# Allegro board SATROT-2-3.brd
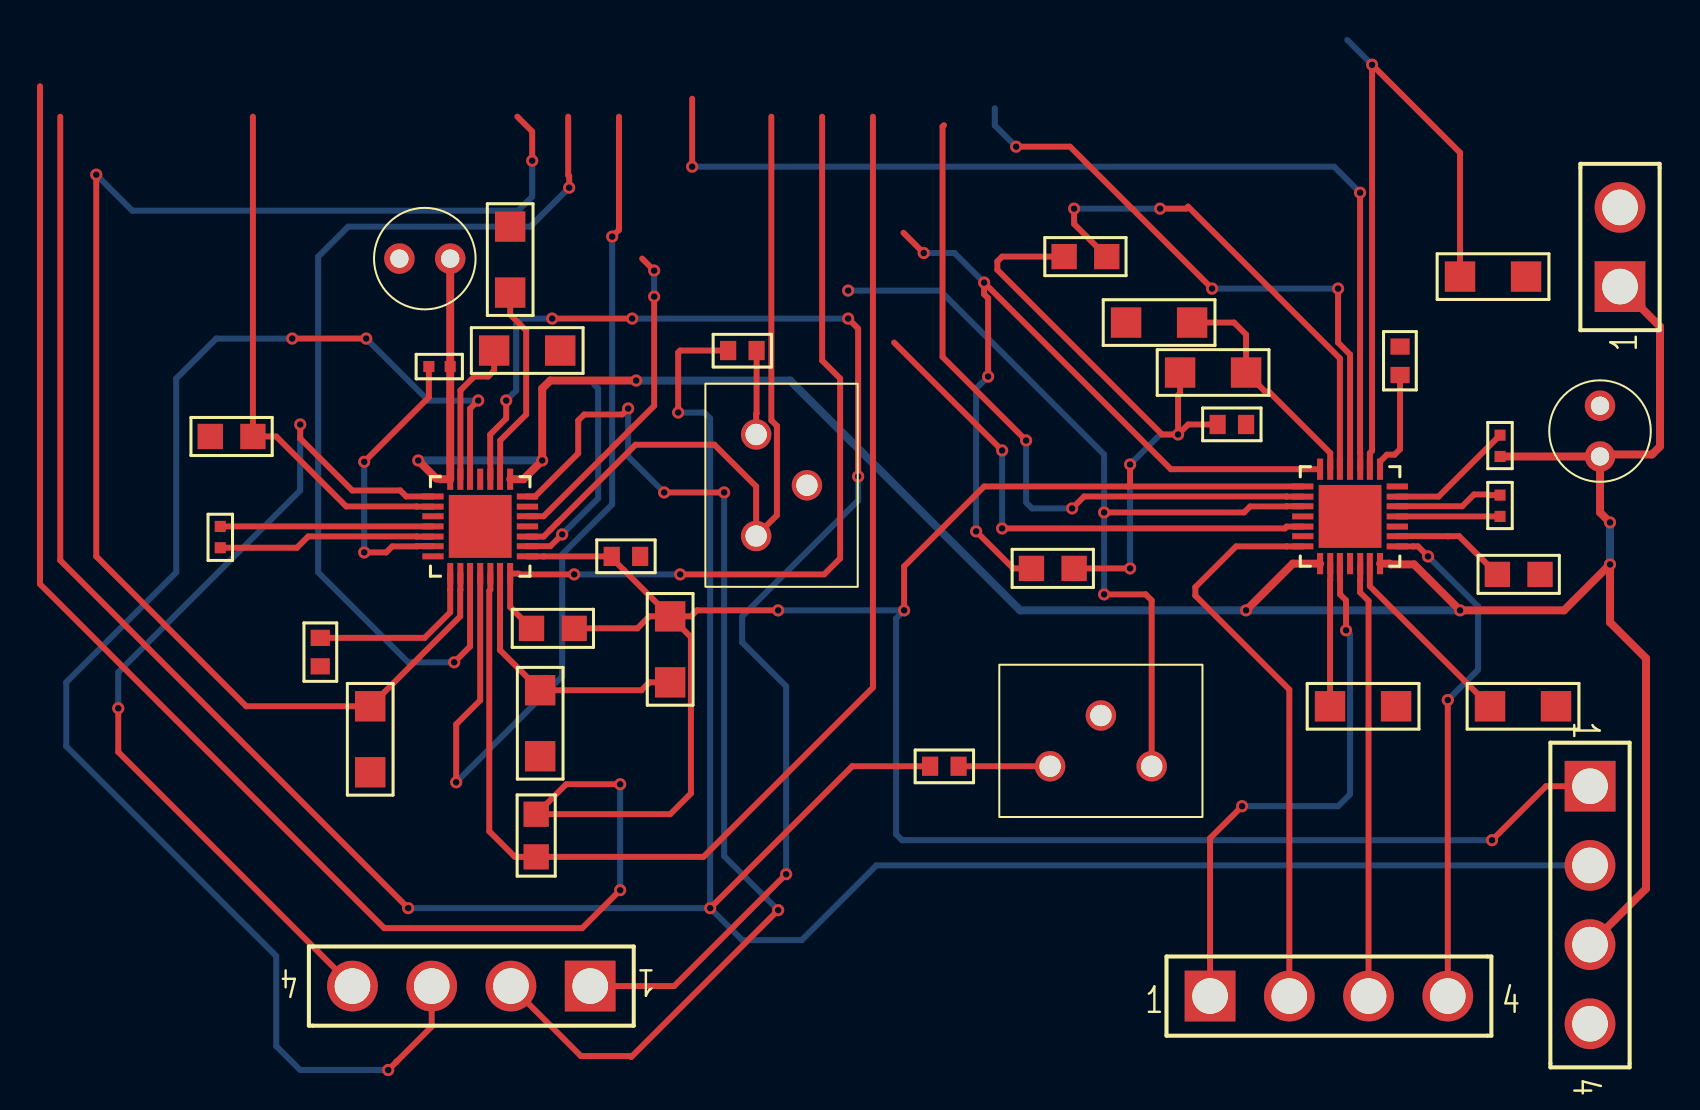
[diagram p0: board, top side]
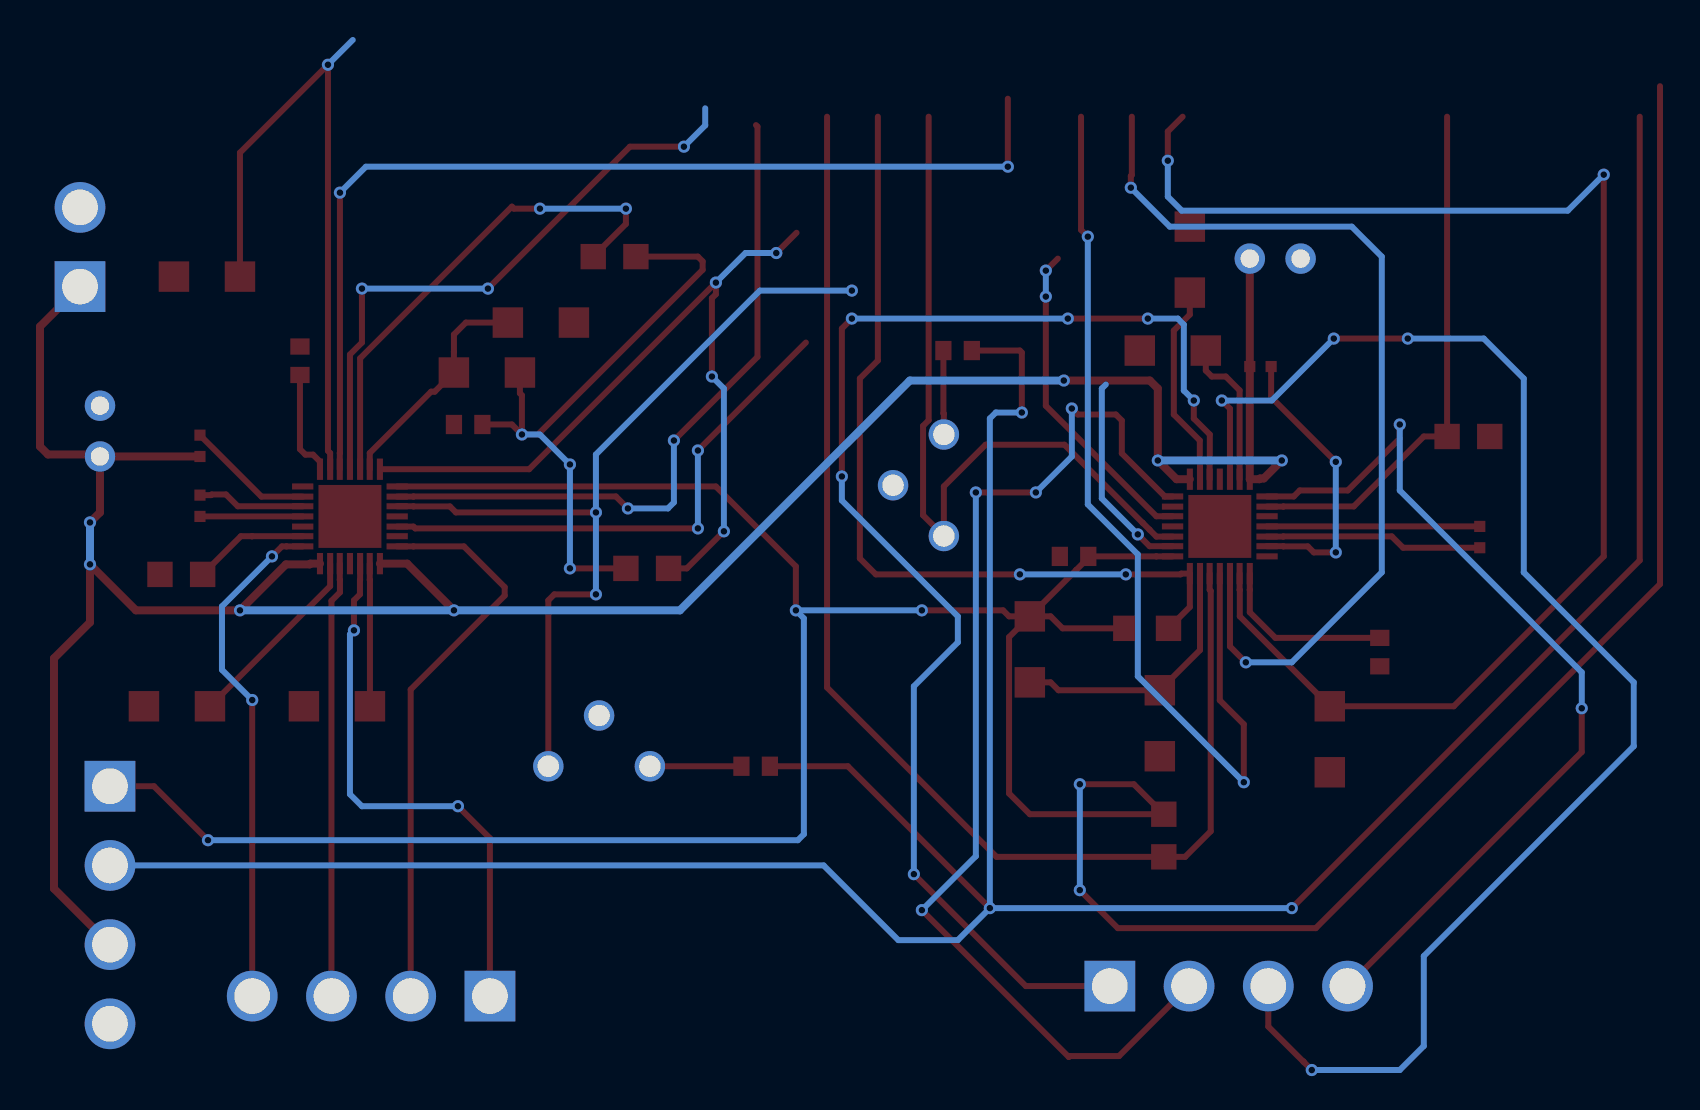
[diagram p1: board, bottom side, seen from below]

No outline. copper layers: TOP, BOTTOM. Coordinates in mm from the lowest, leftmost part position.

## Design rules (mm)
constraint set DEFAULT: min track width 0.3

## Placement (name value [footprint] x y rotation side)
C1  0.1 uF  [SMC0402]  0.5 23.5 270 top
C2  0.22 uF  [SMC0603]  5.5 16.5 90 top
C3  0.1 uF  [SMC0402]  12 31.5 180 top
C4  100 uF  [CAP196]  12 36.9 90 top
C5  0.22 uF  [SMC0603]  21.5 22 180 top
C6  0.1 uF  [SMC0402]  64.5 24 90 top
C7  0.22 uF  [SMC0603]  59.5 32.5 270 top
C8  0.1 uF  [SMC0402]  64.5 27 90 top
C9  100 uF  [CAP196]  69.5 27 0 top
C10  0.22 uF  [SMC0603]  51.8 28.6 180 top
J2  Az Stepper  [BLKCON156VHTM1SQSW1564]  19 0.5 180 top
J3  Motor Power  [BLKCON156VHTM1SQSW1562]  70.5 35.5 90 top
J4  Power Connector  [BLKCON156VHTM1SQSW1564]  69 10.5 270 top
J5  El Stepper  [BLKCON156VHTM1SQSW1564]  50 0 0 top
R1  10K  [SMR1206]  16.5 12 90 top
R2  NP  [SMR1206]  23 19 270 top
R3  100k  [SMR0805]  16.3 9.1 270 top
R4  100k  [SMR0805]  18.2 18.4 180 top
R5  10K POT  [POT]  27.3 28.1 270 top
R6  20K  [SMR0603]  25.9 32.3 0 top
R7  NP  [SMR1206]  8 14.5 270 top
R8  100k  [SMR0805]  0 28 0 top
R9  0.05  [SMR1206]  15 35.2 90 top
R10  0.05  [SMR1206]  14.2 32.3 0 top
R11  10K  [SMR1206]  45.8 33.7 0 top
R12  NP  [SMR1206]  48.5 31.2 0 top
R13  100k  [SMR0805]  42.7 37 0 top
R14  100k  [SMR0805]  43.2 21.4 180 top
R15  10K POT  [POT]  42 11.5 0 top
R16  20K  [SMR0603]  36 11.5 0 top
R17  NP  [SMR1206]  62.5 36 0 top
R18  100k  [SMR0805]  66.5 21.1 180 top
R19  0.05  [SMR1206]  56 14.5 0 top
R20  0.05  [SMR1206]  64 14.5 0 top
U1  A4988SETTR-T  [QFN50P500X500X100-29N]  13.5 23.5 0 top
U2  A4988SETTR-T  [QFN50P500X500X100-29N]  57 24 180 top

## Library data of the parts
C1-C3 C5-C8 C10 = CAP NP
C4 C9 = CAP POL: Tolerance: ***; User Part Number: ***
J2 J4 J5 = 4 HEADER
J3 = CON2
R1-R4 R6-R14 R16-R20 = R
R5 R15 = POT: User Part Number: ***
U1 U2 = A4988SETTR-T

## Footprints (pads in the part's own frame, mm; a bottom-side part is the same pattern mirrored in y, then rotated)
BLKCON156VHTM1SQSW1562
  rect 2.54x2.54 hole 1.778: 1(0,0)
  round 2.54 hole 1.778: 2(3.962,0)
BLKCON156VHTM1SQSW1564
  rect 2.54x2.54 hole 1.778: 1(0,0)
  round 2.54 hole 1.778: 2(3.962,0) 3(7.925,0) 4(11.887,0)
CAP196
  round 1.524 hole 0.914: 1(0,0) 2(0,2.54)
POT
  round 1.524 hole 1.067: 1(0,0) 2(5.08,0) 3(2.54,2.54)
QFN50P500X500X100-29N
  rect 1.067x0.305 smd: 1(-2.362,1.499) 2(-2.362,0.991) 3(-2.362,0.508) 4(-2.362,0) 5(-2.362,-0.508) 6(-2.362,-0.991) 7(-2.362,-1.499) 15(2.362,-1.499) 16(2.362,-0.991) 17(2.362,-0.508) 18(2.362,0) 19(2.362,0.508) 20(2.362,0.991) 21(2.362,1.499)
  rect 0.305x1.067 smd: 8(-1.499,-2.362) 9(-0.991,-2.362) 10(-0.508,-2.362) 11(0,-2.362) 12(0.508,-2.362) 13(0.991,-2.362) 14(1.499,-2.362) 22(1.499,2.362) 23(0.991,2.362) 24(0.508,2.362) 25(0,2.362) 26(-0.508,2.362) 27(-0.991,2.362) 28(-1.499,2.362)
  rect 3.15x3.15 smd: 29(0,0)
SMC0402
  rect 0.559x0.559 smd: 1(0,0) 2(1.067,0)
SMC0603
  rect 0.813x0.965 smd: 1(0,0) 2(1.422,0)
SMR0603
  rect 0.813x0.965 smd: 1(0,0) 2(1.422,0)
SMR0805
  rect 1.27x1.27 smd: 1(0,0) 2(2.134,0)
SMR1206
  rect 1.524x1.524 smd: 1(0,0) 2(3.302,0)

## Nets
3V3: J4.2 R6.1 R16.1
GND: C2.1 C4.2 C5.1 C7.1 C9.2 C10.1 J3.2 J4.4 R1.1 R5.3 R7.2 R8.1 R9.2 R10.2 R11.1 R15.3 R17.2 R18.1 R19.2 R20.2 U1.3 U1.18 U1.29 U2.3 U2.18 U2.29
VDD: C5.2 C10.2 J4.1 R2.1 R3.1 R4.1 R12.1 R13.1 R14.1 U1.15 U2.15
VMM: C3.1 C4.1 C8.1 C9.1 J3.1 J4.3 U1.22 U1.28 U2.22 U2.28
N00486: J2.1 U1.24
N00488: J2.2 U1.21
N00490: J2.3 U1.26
N00492: J2.4 U1.1
N00665: R1.2 R2.2 U1.13
N00675: R3.2 U1.12
N00682: R4.2 U1.14(~SLEEP)
N00813: R5.1 R6.2
N01051: R5.2(WIPER) U1.17
N01158: R8.2 U1.2
N01167: R7.1 U1.9
N01261: R10.1 U1.27
N01273: R9.1 U1.23
N01454: C1.1 U1.4
N01461: C1.2 U1.5
N01528: C2.2 U1.8
N01594: C3.2 U1.6
N04587: J5.1 U2.24
N04591: J5.2 U2.21
N04595: J5.3 U2.26
N04599: J5.4 U2.1
N04699: R11.2 R12.2 U2.13
N04707: R13.2 U2.12
N04715: R14.2 U2.14(~SLEEP)
N04769: R15.1 R16.2
N04789: R15.2(WIPER) U2.17
N04853: R18.2 U2.2
N04861: R17.1 U2.9
N04909: R20.1 U2.27
N04921: R19.1 U2.23
N04961: C6.1 U2.4
N04969: C6.2 U2.5
N04997: C7.2 U2.8
N05017: C8.2 U2.6
N05607: U1.19
N05619: U1.16
N05647: U1.10
N05659: U1.11
N05690: U2.19
N05705: U2.16
N05729: U2.10
N05742: U2.11

Pads without a net: U1 7 20 25; U2 7 20 25

## Via types
v1: diameter 0.61, hole 0.33, TOP to BOTTOM, 70 vias

## Routing (per net, layer and track width the routed paths; a pad name or vN(x,y) marks a point on that pad's centre or on a via; arc(x,y) is an arc through that point)
3V3: length 153.8
  TOP w0.3: v1(25,4.4) 32.1,11.5 R16.1 ; v1(9.9,4.4) -7.5,21.8 -7.5,44 ; v1(23.4,29.2) 23.4,32.2 23.5,32.3 R6.1
  BOTTOM w0.3: J4.2 33.31,6.54 29.58,2.8 26.6,2.8 v1(25,4.4) ; v1(25,4.4) 25,28.9 24.7,29.2 v1(23.4,29.2) ; v1(25,4.4) v1(9.9,4.4)
VDD: length 219.6
  TOP w0.3: R2.1 20.68,21.32 20.68,21.32 20.08,21.92 C5.2 16.67,22 16.67,22 U1.15 ; R2.1 24.04,17.96 24.04,10.14 23,9.1 R3.1 17.8,10.6 v1(20.5,10.6) ; R2.1 21.96,19 21.36,18.4 R4.1 ; R2.1 24.04,19 24.34,19.3 v1(28.4,19.3) ; C10.2 48.9,28.6 v1(48.4,28.1) ; -8.51,45.53 -8.51,20.61 8.7,3.4 18.6,3.4 v1(20.5,5.3) ; v1(48.4,28.1) 47.6,28.1 39.36,36.34 39.36,36.76 39.6,37 R13.1 ; v1(48.4,28.1) 48.4,30.06 48.5,30.16 R12.1 ; v1(46,26.6) 46,25.6 45.9,25.5 ; J4.1 66.8,10.5 v1(64.1,7.8) ; 45.9,25.5 38.7,25.5 34.7,21.5 v1(34.7,19.3) ; 45.9,25.5 U2.15 ; R14.1 v1(46,21.4)
  BOTTOM w0.3: v1(64.1,7.8) 34.6,7.8 34.3,8.1 34.3,18.9 v1(34.7,19.3) v1(28.4,19.3) ; v1(46,21.4) v1(46,26.6) 47.5,28.1 v1(48.4,28.1) ; v1(20.5,5.3) v1(20.5,10.6)
VMM: length 137.3
  TOP w0.4: C9.1 69.6,27.1 72.1,27.1 72.5,27.5 72.5,33.5 J3.1 ; C9.1 69.5,24.2 v1(70,23.7) ; C9.1 C8.1 ; C4.1 C3.1 12,26.72 12,26.72 U1.28 11.52,25.86 11.48,25.9 11.3,25.9 v1(10.4,26.8) ; U1.22 15.66,25.86 v1(16.6,26.8) 16.6,30.4 17,30.8 v1(21.3,30.8) ; U2.28 58.98,21.64 59.02,21.6 60.2,21.6 v1(62.5,19.3) 67.7,19.3 v1(70,21.6) 70,18.7 71.8,16.9 71.8,5.38 J4.3 ; v1(51.8,19.3) 54.14,21.64 U2.22
  BOTTOM w0.4: v1(70,21.6) v1(70,23.7) ; v1(16.6,26.8) v1(10.4,26.8) ; v1(21.3,30.8) 29,30.8 40.5,19.3 v1(51.8,19.3) v1(62.5,19.3)
N00486: length 68.4
  TOP w0.3: v1(32.4,26) 32.4,33.4 v1(31.9,33.9) ; v1(28.8,6.1) 23.2,0.5 J2.1 ; v1(21.1,33.9) v1(17.1,33.9) ; v1(14.8,29.8) 14.8,28.9 14,28.1 14,26.68 14.01,26.67 U1.24
  BOTTOM w0.3: v1(32.4,26) 32.4,24.8 26.6,19 26.6,17.7 28.8,15.5 v1(28.8,6.1) ; v1(31.9,33.9) v1(21.1,33.9) ; v1(17.1,33.9) 15.6,33.9 15.3,33.6 15.3,30.3 v1(14.8,29.8)
N00488: length 55.7
  TOP w0.3: v1(25.7,25.2) v1(22.7,25.2) ; v1(28.4,4.3) 21.05,-3.05 21.01,-3 18.54,-3 J2.2 ; U1.21 16.24,25 18.4,27.16 18.4,28.8 18.7,29.1 20.6,29.1 v1(20.9,29.4)
  BOTTOM w0.3: v1(25.7,25.2) 25.7,7 v1(28.4,4.3) ; v1(20.9,29.4) 20.9,27 v1(22.7,25.2)
N00490: length 72.6
  TOP w0.3: v1(7.8,32.9) v1(4.1,32.9) ; 9.31,-3.29 v1(8.9,-3.7) ; 9.31,-3.29 9.31,-3.26 ; 9.31,-3.29 11.08,-1.52 J2.3 ; U1.26 12.99,29.39 v1(13.4,29.8)
  BOTTOM w0.3: v1(13.4,29.8) 10.9,29.8 v1(7.8,32.9) ; v1(8.9,-3.7) 4.5,-3.7 3.3,-2.5 3.3,2 -7.2,12.5 -7.2,15.7 -1.7,21.2 -1.7,30.9 0.3,32.9 v1(4.1,32.9)
N00492: length 46.1
  TOP w0.3: v1(-4.6,14.4) -4.6,12.21 J2.4 7.11,1.39 ; U1.1 9.8,25 9.5,25.3 7.1,25.3 4.5,27.9 v1(4.5,28.6)
  BOTTOM w0.3: v1(4.5,28.6) 4.5,25.3 -4.6,16.2 v1(-4.6,14.4)
N00665: length 13.3
  TOP w0.3: R2.2 21.96,15.7 21.56,15.3 R1.2 14.49,17.31 U1.13
N00675: length 64.7
  TOP w0.3: 33.14,44 33.14,15.44 24.67,6.97 R3.2 15.23,6.97 13.95,8.25 13.95,20.27 14.01,20.33 U1.12
N00682: length 42.5
  TOP w0.3: v1(18.2,21.1) 15.47,21.1 15.43,21.14 U1.14 15,19.47 R4.2 ; 30.6,44 30.6,31.8 31.5,30.9 31.5,21.9 30.7,21.1 v1(23.5,21.1)
  BOTTOM w0.3: v1(23.5,21.1) v1(18.2,21.1)
N00813: length 4.2
  TOP w0.3: R5.1 27.3,29.14 27.32,29.16 R6.2
N01051: length 38.2
  TOP w0.3: 28.06,44 28.06,28.81 28.34,28.53 28.34,24.06 R5.2 27.3,25.5 25.21,27.59 21.27,27.59 17.36,23.68 17.36,23.68 17.02,23.34 17.02,23.34 16.67,22.99 U1.17
N01158: length 26.5
  TOP w0.3: 2.13,44 R8.2 3.3,28 6.8,24.5 10.32,24.5 10.33,24.49 U1.2
N01167: length 71.6
  TOP w0.3: v1(-5.7,41.1) -5.7,22 1.8,14.5 R7.1 12.5,19 12.5,20.32 12.51,20.33 U1.9 ; v1(16.1,41.8) 16.1,43.26 15.36,44
  BOTTOM w0.3: v1(16.1,41.8) 16.1,40 15.4,39.3 -3.9,39.3 v1(-5.7,41.1)
N01261: length 7.5
  TOP w0.3: U1.27 12.51,30.31 13.2,31 13.9,31 14.2,31.3 R10.1
N01273: length 10.2
  TOP w0.3: U1.23 14.49,26.67 14.5,26.68 14.5,27.8 15.8,29.1 15.8,33.3 15,34.1 R9.1
N01454: length 10.6
  TOP w0.3: C1.1 U1.4
N01461: length 10.9
  TOP w0.3: U1.5 10.33,22.99 10.32,23 4.9,23 4.33,22.43 C1.2
N01528: length 9
  TOP w0.3: U1.8 12,20.33 12,20.33 12,19.2 10.72,17.92 C2.2
N01594: length 14.2
  TOP w0.3: U1.6 10.33,22.51 10.32,22.5 9.1,22.5 8.8,22.2 v1(7.7,22.2) ; v1(7.7,26.73) 10.93,29.97 C3.2
  BOTTOM w0.3: v1(7.7,26.73) v1(7.7,22.2)
N04587: length 27.6
  TOP w0.3: J5.1 50,7.9 v1(51.6,9.5) ; v1(56.8,18.3) 56.8,19.8 56.5,20.1 56.5,20.82 56.49,20.83 U2.24
  BOTTOM w0.3: v1(51.6,9.5) 56.4,9.5 57,10.1 57,18.1 v1(56.8,18.3)
N04591: length 28.6
  TOP w0.3: U2.21 53.83,22.5 53.83,22.5 51.3,22.5 49.26,20.46 49.26,20.04 53.96,15.34 J5.2
N04595: length 21.8
  TOP w0.3: U2.26 57.51,20.83 57.5,20.82 57.5,20.2 57.92,19.78 J5.3
N04599: length 25.4
  TOP w0.3: J5.4 v1(61.89,14.81) ; v1(60.9,22) 60.4,22.5 60.17,22.5 60.17,22.5 U2.1
  BOTTOM w0.3: v1(60.9,22) 63.4,19.5 63.4,16.33 v1(61.89,14.81)
N04699: length 11.5
  TOP w0.3: U2.13 56.01,27.17 52.94,30.24 52.76,30.24 R12.2 51.8,32.24 51.8,32.24 51.8,33.1 51.2,33.7 R11.2
N04707: length 25.1
  TOP w0.3: v1(47.5,39.4) 48.8,39.4 48.9,39.5 56.49,31.91 U2.12 ; v1(43.2,39.4) 43.2,38.63 R13.2
  BOTTOM w0.3: v1(43.2,39.4) v1(47.5,39.4)
N04715: length 42
  TOP w0.3: 34.67,38.19 v1(35.68,37.18) ; v1(38.9,31) 38.9,34.92 38.7,35.12 v1(38.7,35.7) 48.04,26.36 U2.14 ; R14.2 40.15,21.4 v1(38.3,23.25)
  BOTTOM w0.3: v1(35.68,37.18) 37.22,37.18 v1(38.7,35.7) ; v1(38.9,31) 38.3,30.4 v1(38.3,23.25)
N04769: length 4.6
  TOP w0.3: R16.2 R15.1
N04789: length 44.1
  TOP w0.3: v1(44.7,20.1) 46.78,20.1 47.08,19.8 R15.2 ; v1(44.7,24.2) 51.7,24.2 52,24.5 53.82,24.5 53.83,24.51 U2.17
  BOTTOM w0.3: v1(31.9,35.3) 36.5,35.3 44.7,27.1 v1(44.7,24.2) v1(44.7,20.1)
N04853: length 5.8
  TOP w0.3: R18.2 62.46,23.01 61.89,23.01 ; 61.9,23 61.89,23.01 ; 61.89,23.01 U2.2
N04861: length 34.5
  TOP w0.3: R17.1 62.5,42.2 v1(58.1,46.6) 58.1,27.28 57.99,27.17 U2.9
  BOTTOM w0.3: 56.86,47.84 v1(58.1,46.6)
N04909: length 9.6
  TOP w0.3: U2.27 57.99,20.51 R20.1
N04921: length 7.1
  TOP w0.3: R19.1 56,20.82 56.01,20.83 U2.23
N04961: length 5.1
  TOP w0.3: C6.1 U2.4
N04969: length 5.4
  TOP w0.3: U2.5 62.61,24.51 63.2,25.1 63.91,25.1 63.94,25.07 C6.2
N04997: length 5.4
  TOP w0.3: U2.8 58.5,26.74 58.85,27.09 59.23,27.09 59.5,27.36 C7.2
N05017: length 6.4
  TOP w0.3: C8.2 61.42,24.99 U2.6
N05607: length 16.2
  TOP w0.3: 21.6,36.9 v1(22.2,36.3) ; U1.19 16.67,24.01 22.2,29.54 v1(22.2,35)
  BOTTOM w0.3: v1(22.2,35) v1(22.2,36.3)
N05619: length 10.3
  TOP w0.3: U1.16 17.01,22.51 v1(17.6,23.1)
  BOTTOM w0.3: v1(17.6,23.1) 19.4,24.9 19.4,30.4 19.2,30.6
N05647: length 46.9
  TOP w0.3: 17.9,44 17.9,41.08 17.95,41.03 v1(17.95,40.45) ; U1.10 12.99,17.49 v1(12.2,16.7)
  BOTTOM w0.3: 18,40.5 v1(17.95,40.45) 16,38.5 6.9,38.5 5.4,37 5.4,21.2 9.9,16.7 v1(12.2,16.7)
N05659: length 47.6
  TOP w0.3: 20.44,44 20.44,38.34 v1(20.1,38) ; v1(12.3,10.7) 12.3,13.6 13.5,14.8 U1.11
  BOTTOM w0.3: v1(20.1,38) 20.1,24.6 17.6,22.1 17.6,16 v1(12.3,10.7)
N05690: length 26.6
  TOP w0.3: U2.19 53.83,23.49 53.74,23.4 v1(39.6,23.4) ; 34.2,32.7 v1(39.6,27.3)
  BOTTOM w0.3: v1(39.6,27.3) v1(39.6,23.4)
N05705: length 34.9
  TOP w0.3: v1(43.1,24.4) 43.7,25 53.82,25 53.83,24.99 U2.16 ; 36.69,43.58 36.62,43.51 36.62,31.98 v1(40.8,27.8)
  BOTTOM w0.3: v1(40.8,27.8) 40.8,24.7 41.1,24.4 v1(43.1,24.4)
N05729: length 51.2
  TOP w0.3: 24.1,44.9 v1(24.1,41.5) ; U2.10 57.51,27.17 57.5,27.18 v1(57.5,40.2)
  BOTTOM w0.3: v1(24.1,41.5) 56.2,41.5 v1(57.5,40.2)
N05742: length 30.7
  TOP w0.3: U2.11 57,32.1 56.4,32.7 v1(56.4,35.4) ; v1(40.3,42.5) 43,42.5 v1(50.1,35.4)
  BOTTOM w0.3: v1(50.1,35.4) v1(56.4,35.4) ; 39.23,44.42 39.23,43.57 v1(40.3,42.5)
